# Altium PCB pcb.PCBDOC
Units mm, origin at the board's own origin, x right, y up, seen from the top; angles counter-clockwise.
Board outline 70 x 98 mm, 2 copper layers (TopLayer, BottomLayer), stack 1.671 mm thick; 33 components, 41 nets, 144 pads, 28 vias.
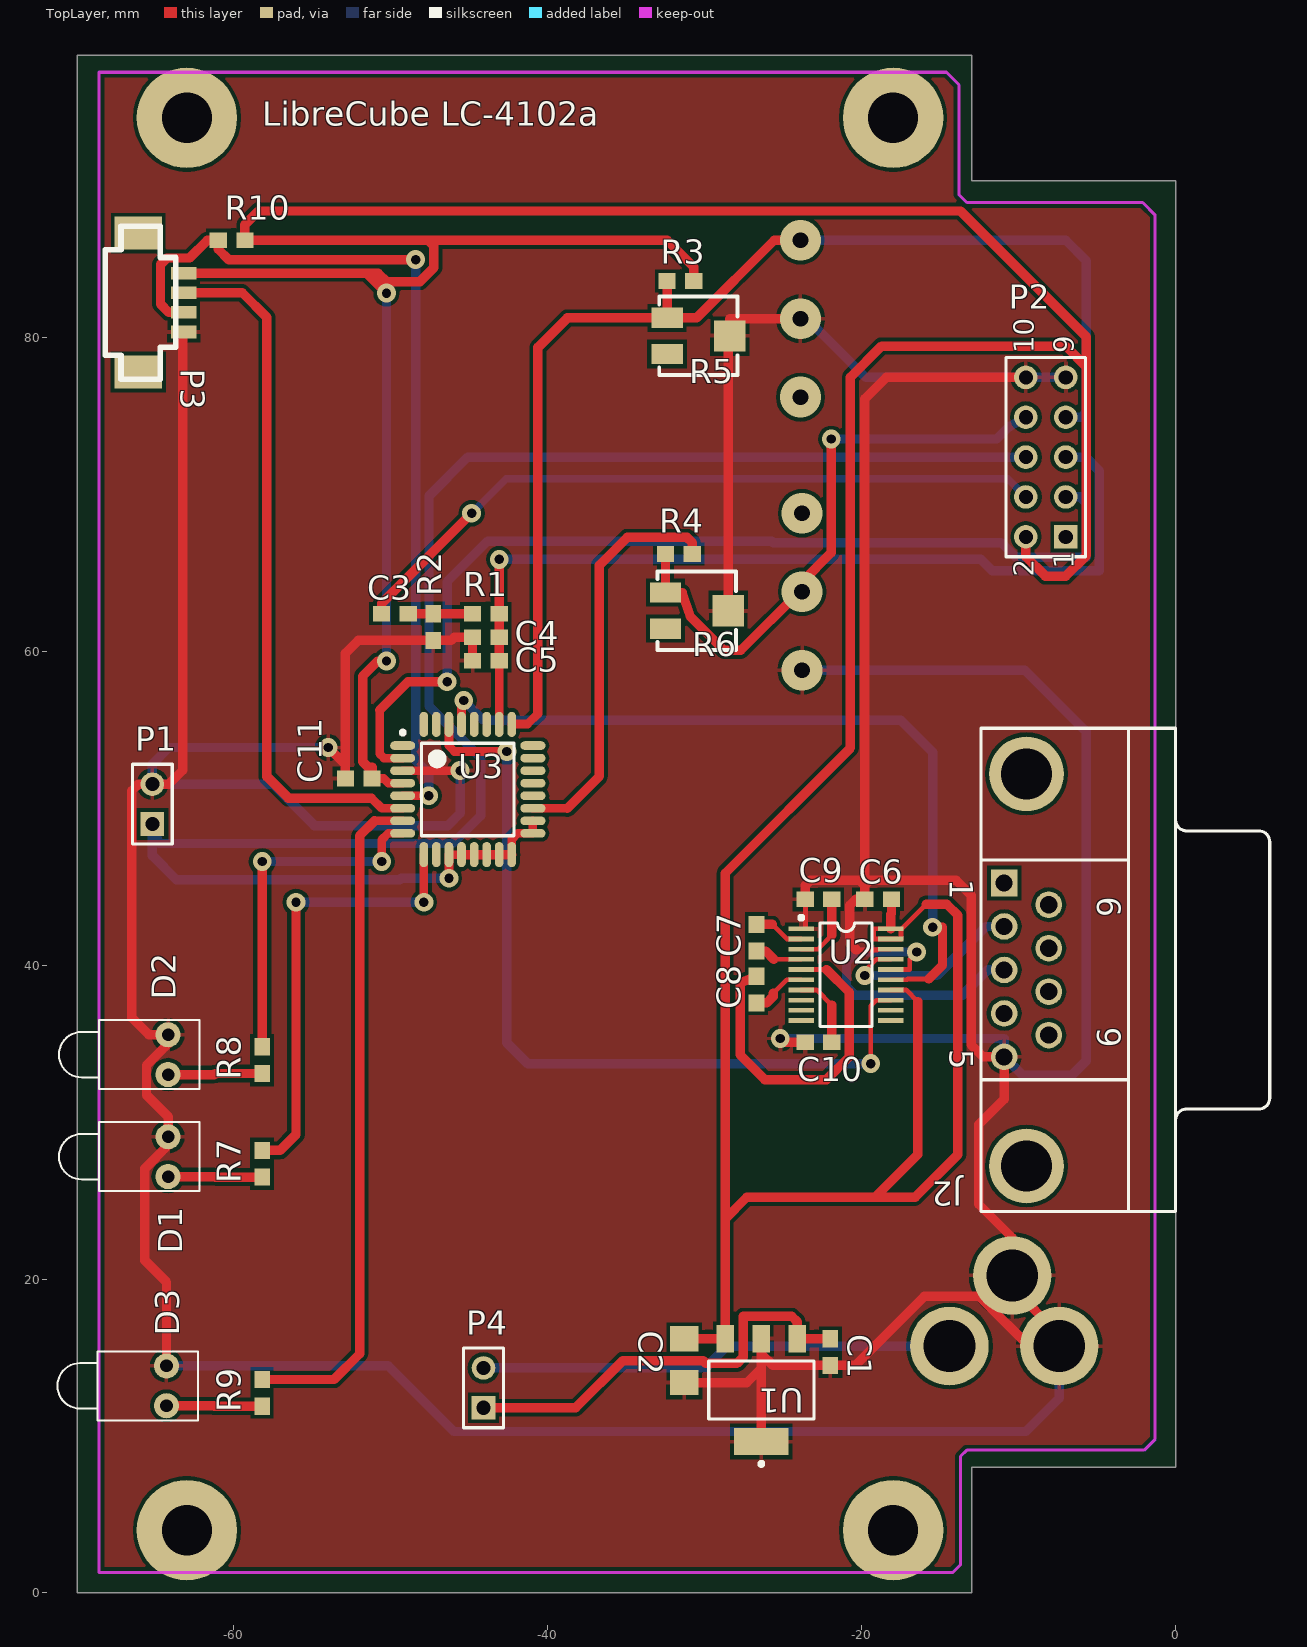
[diagram p0: TopLayer view]
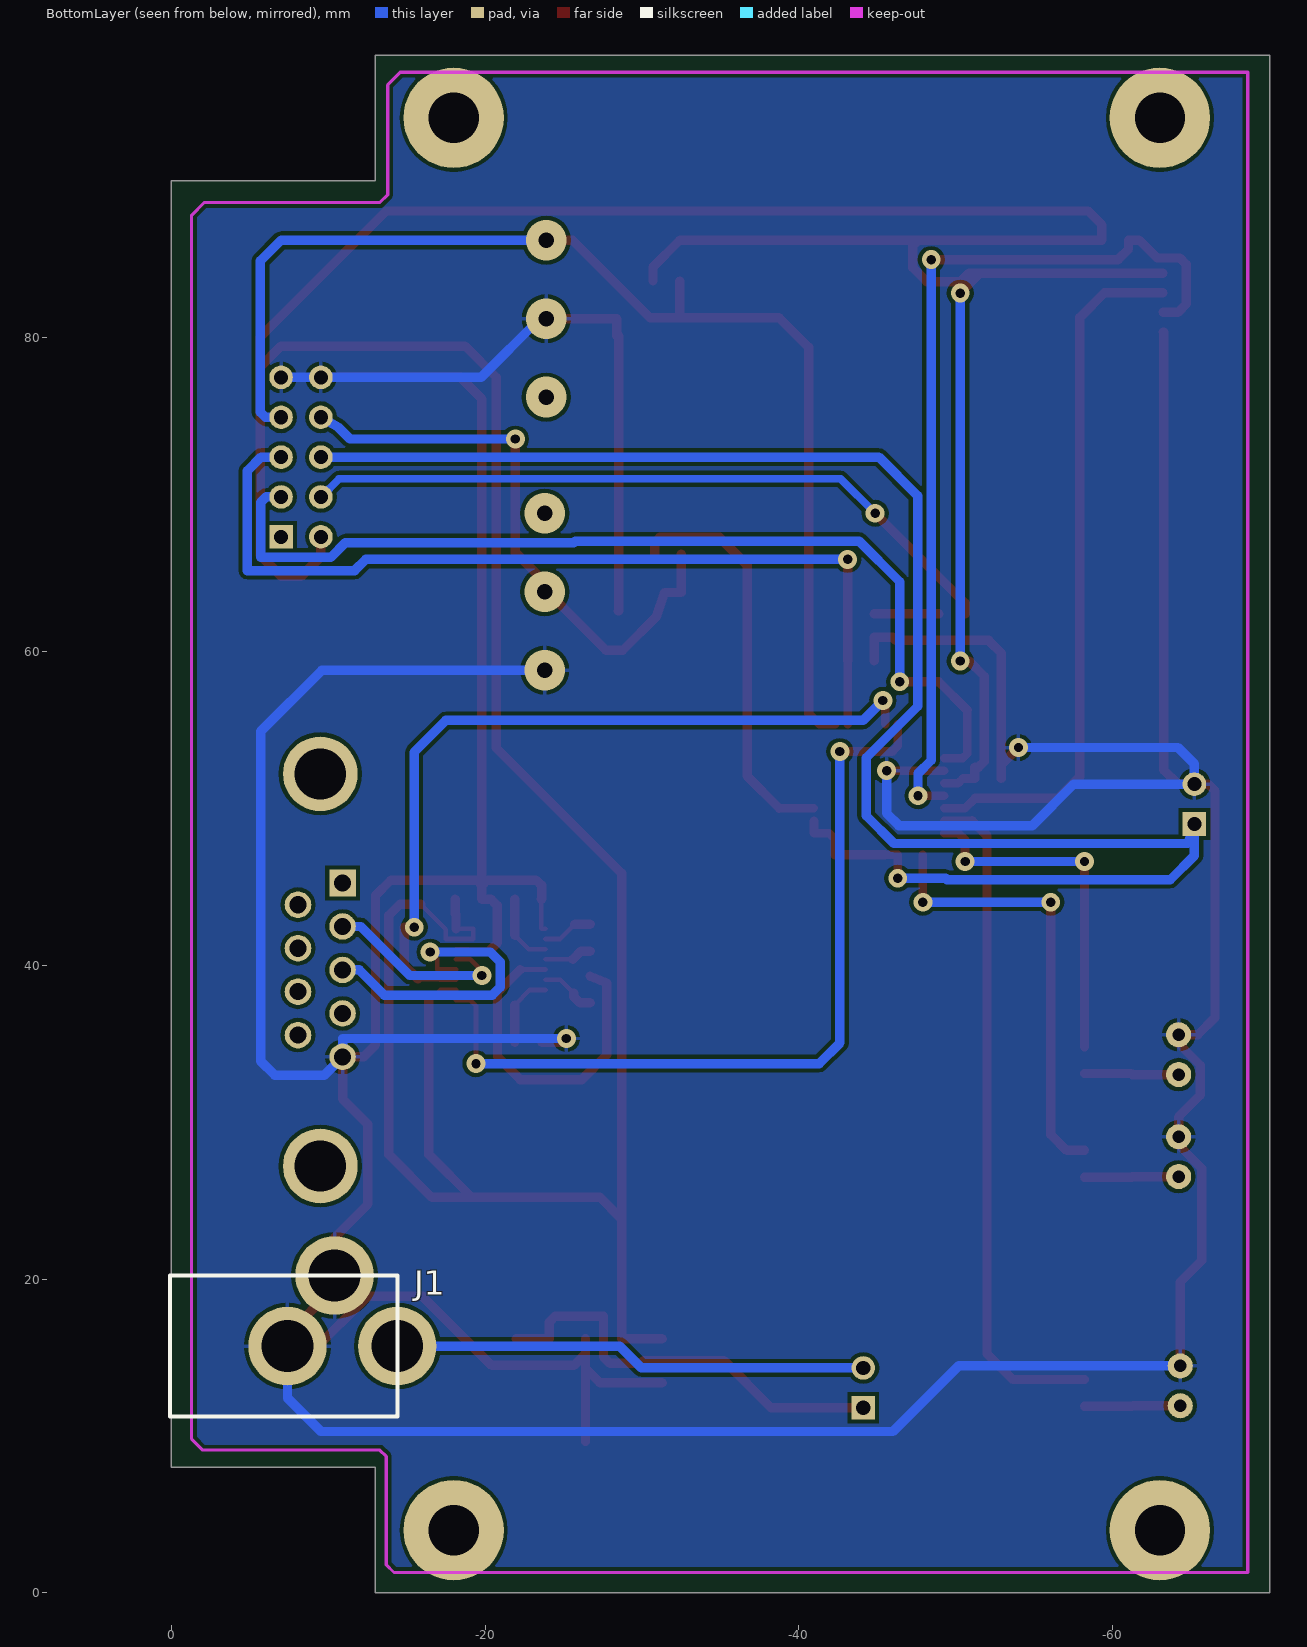
[diagram p1: BottomLayer view, seen from below]

## Layer stack, top to bottom
TopLayer: signal copper 0.0356
Dielectric: core 1.6, FR-4, Dk 4.8
BottomLayer: signal copper 0.0356

## Board outline
-70,0 -13,0 -13,8 0,8 0,90 -13,90 -13,98 -70,98

## Design rules (kind name [scope] priority, off if disabled: settings)
Clearance [All] p1: gap=0.25
FabricationTestPointUsage TestPointUsage [All] p1: valid=0 allowmultiple=FALSE
FabricationTestpoint Testpoint [All] p1: side=3 testpointundercomponent=TRUE minsize=1.016 maxsize=2.54 preferedsize=1.524 minholesize=0.508 maxholesize=1.016 preferedholesize=0.813 testpointgrid=0.025 allowsidetop=TRUE allowsidebottom=TRUE usegrid=TRUE gridtolerance=0
PlaneClearance [All] p1: clearance=0
PolygonConnect [All] p1: connectstyle=Relief reliefconductorwidth=0.254 reliefentries=4 polygonreliefangle="90 Angle"
RoutingVias [All] p1: holewidth=0.6 width=1.2 viastyle="Through Hole" minholewidth=0.2 minwidth=0.4 maxholewidth=5 maxwidth=10
SMDNeckDown [All] p1: percent=100.000
SilkscreenOverComponentPads [All] p1: minsilkscreentomaskgap=0.254
SolderMaskExpansion [All] p1: expansion=0.102
Width [All] p1: maxlimit=10 minlimit=0.3 preferedwidth=0.6
24 further rules are at their usual default settings.

## Classes and differential pairs
component class main: C1 C2 C3 C4 C5 C6 C7 C8 C9 C10 D1 D2 D3 J1 J2 P1 P2 P4 R1 R2 R3 R4 R5 R6 R7 R8 R9 R? U1 U2
component class "U_microcontroller module": C11 P3 R10 U3

## Components (designator, comment, footprint, x,y, rotation, side; value= is the part's Value field where it differs from the comment)
C1 "0.1 uF" 0603 -22,14.5 r90 top
C2 "10 uF" 1206 -31.3,13.4 r90 top
C3 "2.2 uF" 0603 -50.6,62.4 r0 top
C4 "470 pF" 0603 -44.8,60.9 r0 top
C5 "470 pF" 0603 -44.8,59.4 r0 top
C6 "0.1 uF" 0603 -19.8,44.2 r0 top
C7 "0.1 uF" 0603 -26.7,42.6 r270 top
C8 "0.1 uF" 0603 -26.7,37.6 r90 top
C9 "0.1 uF" 0603 -21.9,44.2 r180 top
C10 "0.1 uF" 0603 -23.6,35.1 r0 top
C11 "0.1 uF" 0603 -51.2,51.9 r180 top
D1 "LED1" LED-1 -64.2,27.8 r180 top
D2 "LED1" LED-1 -64.2,34.3 r180 top
D3 "LED1" LED-1 -64.3,13.2 r180 top
J1 "MINIJACK-1.3" POWERJACK -9.5,15.5 r270 bottom
J2 "D Connector 9" DSUB1.385-2H9 0,39.7 r270 top
P1 "Header 2" HDR1X2 -65.2,49 r90 top
P2 "Header 5X2" HDR2X5 -7,67.3 r90 top
P3 "MICRO-04-R-SMT" MICRO-04-R-SMT -63.2,84.1 r270 top
P4 "Header 2" HDR1X2 -44.1,11.8 r90 top
R1 "120 k" 0603 -43.1,62.4 r180 top
R2 "100 k" 0603 -47.3,60.7 r90 top
R3 "1 k" 0603 -32.4,83.6 r0 top
R4 "1 k" 0603 -32.5,66.2 r0 top
R5 "RPot SM" POT4MM-2 -30.4,80.1 r0 top
R6 "RPot SM" POT4MM-2 -30.5,62.6 r0 top
R7 "1 k" 0603 -58.2,26.5 r90 top
R8 "1 k" 0603 -58.2,33.1 r90 top
R9 "1 k" 0603 -58.2,11.9 r90 top
R10 "1 k" 0603 -59.3,86.2 r180 top
U1 "LM2937-3.3" SOT-223 -24.099,16.2 r180 top
U2 "MAX3223" TSSOP-20 -21,39.4 r270 top
U3 "C8051F310" TQFP-32 -45.1,51.2 r0 top

## Footprints (in the part's own frame and the unit in brackets; to place one, negate y for a bottom-side part, rotate by r counter-clockwise, add the part's x,y. Pads: shape width x height; smd on the part's side, far side on the other; paste and mask are expansions set on the pad)
0603 [mm] "Chip Capacitor; Body 1.6 x 0.8 mm (LxW typ)"
  rect 1.1x1 smd: 1(0,0) 2(1.7,0)
1206 [mm] "Chip Capacitor; Body 3.2 x 1.6 mm (LxW typ)"
  rect 1.6x1.8 smd: 1(0,0) 2(2.8,0)
DSUB1.385-2H9 [mm] "Connector; D Subminiature; 9 Position; Right Angle; Pitch 1.385 mm"
  rect 1.69x1.69 hole 1.09: 1(-5.54,-10.92)
  round 1.69 hole 1.09: 2(-2.77,-10.92) 3(0,-10.92) 4(2.77,-10.92) 5(5.54,-10.92) 6(-4.155,-8.08) 7(-1.385,-8.08) 8(1.385,-8.08) 9(4.155,-8.08)
  round 4.76 hole 3.26: 10(-12.495,-9.5) 11(12.495,-9.5)
  silkscreen extent -15.4,-12.4 15.4,6
HDR1X2 [mm] "Connector; Header; 2 Position"
  rect 1.5x1.5 hole 0.9: 1(0,0)
  round 1.5 hole 0.9: 2(2.54,0)
  silkscreen extent -1.27,-1.27 3.81,1.27
HDR2X5 [mm] "Connector; Header; 5x2 Position"
  rect 1.5x1.5 hole 0.9: 1(0,0)
  round 1.5 hole 0.9: 2(0,2.54) 3(2.54,0) 4(2.54,2.54) 5(5.08,0) 6(5.08,2.54) 7(7.62,0) 8(7.62,2.54) 9(10.16,0) 10(10.16,2.54)
  silkscreen extent -1.27,-1.27 11.43,3.81
LED-1 [mm] "Typical RED GaAs LED; 2 Leads"
  round 1.6 hole 0.8: 1(0,1.27) 2(0,-1.27)
  silkscreen extent -2,-2.2 6.95,2.2
MICRO-04-R-SMT [mm] "Micro Connector Rectangular"
  rect 0.8x1.6 smd: 1(0,0) 2(1.25,0) 3(2.5,0) 4(3.75,0)
  rect 2.1x3 smd: ""(-2.55,-2.9) ""(6.3,-2.9)
  silkscreen extent -3,-5 6.75,-0.5
POT4MM-2 [mm] "Square Trimming Potentiometer"
  rect 2x1.3 smd: CCW(-2,-1.15) CW(-2,1.15)
  rect 2x2 smd: W(2,0)
  silkscreen extent -2.5,-2.5 2.5,2.5
POWERJACK [mm]
  round 5 hole 3.3: 1(-0.23,4.91) 2(-4.73,0.91) 3(-0.23,-2.09)
  silkscreen extent -4.73,-9.59 4.27,4.91
SOT-223 [mm]
  rect 1.1x1.75 smd: 1(0,0) 2(2.3,0) 3(4.6,0)
  rect 3.45x1.75 smd: 4(2.3,6.55)
  silkscreen extent -1.05,1.43 5.65,8.1
TQFP-32 [mm] "TQFP, 32-Leads, Body 9.0x9.0mm (max), Pitch 0.80mm, IPC Medium Density"
  oval 1.6x0.55 smd: 1(-4.15,2.8) 2(-4.15,2) 3(-4.15,1.2) 4(-4.15,0.4) 5(-4.15,-0.4) 6(-4.15,-1.2) 7(-4.15,-2) 8(-4.15,-2.8) 17(4.15,-2.8) 18(4.15,-2) 19(4.15,-1.2) 20(4.15,-0.4) 21(4.15,0.4) 22(4.15,1.2) 23(4.15,2) 24(4.15,2.8)
  oval 0.55x1.6 smd: 9(-2.8,-4.15) 10(-2,-4.15) 11(-1.2,-4.15) 12(-0.4,-4.15) 13(0.4,-4.15) 14(1.2,-4.15) 15(2,-4.15) 16(2.8,-4.15) 25(2.8,4.15) 26(2,4.15) 27(1.2,4.15) 28(0.4,4.15) 29(-0.4,4.15) 30(-1.2,4.15) 31(-2,4.15) 32(-2.8,4.15)
  silkscreen extent -4.27,-2.95 2.95,3.75
TSSOP-20 [mm] "Shrink Small Outline; 20 Leads; Body Width 4.4 mm; Pitch 0.65 mm"
  rect 0.3x1.6 smd: 1(-2.925,-2.85) 2(-2.275,-2.85) 3(-1.625,-2.85) 4(-0.975,-2.85) 5(-0.325,-2.85) 6(0.325,-2.85) 7(0.975,-2.85) 8(1.625,-2.85) 9(2.275,-2.85) 10(2.925,-2.85) 11(2.925,2.85) 12(2.275,2.85) 13(1.625,2.85) 14(0.975,2.85) 15(0.325,2.85) 16(-0.325,2.85) 17(-0.975,2.85) 18(-1.625,2.85) 19(-2.275,2.85) 20(-2.925,2.85)
  silkscreen extent -3.75,-2.97 3.3,1.65

## Part data
C1 C2 C3 C4 C5 C6 C7 C8 C9 C10: library part Capacitor, "Capacitor"
C11: library part Cap
D1 D2 D3: "Typical RED GaAs LED"
J1: library part PWRJACK-1.3
J2: "Receptacle Assembly, 9 Position, Right Angle"
P1 P4: "Header, 2-Pin"
P2: "Header, 5-Pin, Dual row"
P3: library part MICRO-04, "Micro Connector"
R1 R2 R3 R4 R7 R8 R9: library part Resistor, "Resistor"
R5 R6: "Square Trimming Potentiometer"
R10: library part Res1
U1: library part LM2937, "LDO"
U3: "336-1252-ND"

## Free pads (board coordinates)
  round 6.4 hole 3.2: ""(-63,4) ""(-63,94) ""(-18,4) ""(-18,94)

## Via types
v1: diameter 1.2, hole 0.6, TopLayer to BottomLayer, 22 vias
v2: diameter 2.6, hole 1, TopLayer to BottomLayer, 6 vias

## Nets (pads, with @x,y where several pads share a name; then routed paths per layer and width w, separated by ;. In a path a pad name is that pad's centre, name@x,y a point inside that pad or via, vN(x,y) a via of type N, cw(c..) or ccw(c..) an arc to the next point about the centre after c; other vN are vias at no path point)
+3.3V: C2.2 C6.2 C11.1 P2.2 P3.1 R3.2 R10.1 U1.3 U2.14 U2.19 U2.20 U3.4 | length 355.9
  TopLayer w0.3: U2.14 -17.16,38.425 -16.423,37.688 ; U2.20 -19.253,42.325 -19.253,41.675 U2.19 -17.49,41.675 -17.49,42.291 -15.89,43.891
  TopLayer w0.55: C11.1 -50.459,51.9 -50.159,51.6 U3.4
  TopLayer w0.6: C11.1 -51.2,52.629 -51.45,52.629 -51.806,52.984 -51.806,58.42 -50.84,59.385 v1(-50.282,59.385) ; v1(-50.282,82.83) -51.552,84.1 ; C2.2 -30.012,16.2 U1.3 ; R3.2 -30.7,84.5 -32.4,86.2 -47.64,86.2 ; U2.20 -18.15,43.231 -18.1,43.281 C6.2 ; -16.423,37.688 -16.423,27.94 -19.149,25.214 ; -15.89,43.891 -14.581,43.891 -13.87,43.18 -13.87,27.94 -16.595,25.214 -19.149,25.214 ; P2.2 -9.54,66.04 -8.295,64.795 -7,64.795 -5.679,66.116 ; R10.1 -59.3,87.197 -58.435,88.062 -13.706,88.062 -5.679,80.035 -5.679,78.13 ; R10.1 -47.64,86.2 ; R10.1 -47.64,86.2 ; -51.552,84.1 P3.1 -51.552,84.1 ; -51.552,84.1 -50.816,84.1 -50.282,83.566 -48.148,83.566 -47.259,84.455 -47.259,85.819 -47.64,86.2 ; U1.3 -28.699,23.835 ; U1.3 -28.699,23.835 ; -28.699,23.835 -28.699,45.865 -20.716,53.848 -20.716,77.47 -18.735,79.451 -7,79.451 -5.679,78.13 ; -28.699,23.835 -27.32,25.214 ; -27.32,25.214 -19.149,25.214 ; -27.32,25.214 -19.149,25.214 ; -5.679,66.116 -5.679,78.13 ; -5.679,66.116 -5.679,78.13
  BottomLayer w0.6: v1(-50.282,59.385) v1(-50.282,82.83)
+9V: J1.1 P4.2 | length 30.3
  BottomLayer w0.6: P4.2 -29.962,14.34 -28.572,15.73 J1.1
-PTT: P1.1 P2.6 U3.11 U3.12 U3.13 U3.14 U3.15 U3.16 U3.17 U3.18 | length 113.7
  TopLayer w0.55: v1(-46.3,45.542) U3.11@-46.3,47.041 ; U3.12 -45.5,47.041 U3.11@-46.3,47.041 ; U3.16 -42.3,48.025 -41.925,48.4 U3.17@-40.96,48.4 ; U3.18 -40.96,49.2 U3.17@-40.96,48.4 ; U3.11@-46.3,47.041 U3.11 U3.11@-46.3,47.041 ; U3.17@-40.96,48.4 U3.17 U3.17@-40.96,48.4
  TopLayer w0.6: U3.12 U3.13 U3.14 U3.15 U3.16
  BottomLayer w0.6: v1(-46.3,45.542) -49.348,45.542 -49.436,45.453 -63.663,45.453 -65.2,46.99 P1.1 -64.785,47.759 -46.058,47.759 -44.287,49.53 -44.287,53.225 -47.571,56.508 -47.571,69.909 -45.1,72.38 P2.6
C2CK: P3.3 R10.2 U3.5 | length 58.1
  TopLayer w0.55: U3.5 v1(-47.589,50.8)
  TopLayer w0.6: P3.3 -64.15,81.6 -64.683,82.133 -64.683,84.658 -64.277,85.065 -62.829,85.065 -61.694,86.2 R10.2 -61,85.623 -60.34,84.963 v1(-48.427,84.963)
  BottomLayer w0.6: v1(-48.427,84.963) -48.427,53.061 -47.589,52.222 v1(-47.589,50.8)
C2D: P3.2 U3.6 | length 44.7
  TopLayer w0.55: -51.234,50.648 -50.586,50 U3.6
  TopLayer w0.6: P3.2 -59.472,82.85 -57.902,81.28 -57.902,52.019 -56.53,50.648 -51.234,50.648
COMP0: P2.3 U3.2 | length 62.9
  TopLayer w0.55: -50.715,56.26 -50.715,53.467 -50.447,53.2 U3.2
  TopLayer w0.6: -50.715,56.26 -48.91,58.064 v1(-46.421,58.064)
  BottomLayer w0.6: v1(-46.421,58.064) -46.421,64.44 -43.83,67.031 -25.745,67.031 -25.644,66.929 -11.104,66.929 -10.175,66 -5.7,66 -5.7,69.492 -6.048,69.84 P2.3
COMP0_NEG: P2.7 R3.1 R5.CW U3.25 | length 77.1
  TopLayer w0.55: U3.25 -42.3,55.372 -41.29,55.372 -40.63,56.032
  TopLayer w0.6: -40.63,56.032 -40.63,79.37 -38.75,81.25 R5.CW ; R3.1 R5.CW ; v2(-23.9,86.2) -25.57,86.2 -30.52,81.25 R5.CW
  BottomLayer w0.6: v2(-23.9,86.2) -7,86.2 -5.679,84.879 -5.679,75.248 -6.007,74.92 P2.7
COMP0_POS: C4.2 C5.2 P2.5 R1.1 U3.26 | length 57.9
  TopLayer w0.55: U3.26 -43.1,56.744 C5.2
  TopLayer w0.6: C5.2 -43.1,60.147 C4.2 R1.1 v1(-43.1,65.862)
  BottomLayer w0.6: v1(-43.1,65.862) -12.402,65.862 -11.69,65.15 -4.85,65.15 -4.85,71.5 -5.73,72.38 P2.5
DATAIN: C3.1 P2.4 | length 45.5
  TopLayer w0.6: C3.1 -50.6,63.055 v1(-44.855,68.8)
  BottomLayer w0.5: v1(-44.855,68.8) -42.655,71 -10.7,71 P2.4
DATAOUT: P2.8 R4.1 R6.CW | length 38.1
  TopLayer w0.6: R4.1 R6.CW -31.448,63.75 -30.927,62.23 -28.768,60.071 -27.701,60.071 -23.972,63.8 v2(-23.8,63.8) -23.8,64.429 -21.935,66.294 v1(-21.935,73.533)
  BottomLayer w0.6: v1(-21.935,73.533) -11.394,73.533 -10.632,74.295 P2.8
GND: C1.1 C2.1 C4.1 C5.1 C6.1 C9.2 C10.1 C11.2 D1.2 D2.2 D3.2 J1.2 J1.3 J2.5 P1.2 P2.9 P2.10 P3.4 R2.1 R5.W R6.W U1.2 U1.4 U2.1 U2.18 U3.3 | length 436.4
  TopLayer w0.3: U2.1 -23.586,42.325 C9.2@-23.586,44.2 ; -20.335,40.97 -19.018,40.97 -18.963,41.025 U2.18
  TopLayer w0.55: U3.3 v1(-45.589,52.4)
  TopLayer w0.6: D3.2 -64.3,19.81 -65.674,21.184 -65.674,27.05 -64.2,28.524 D1.2 -64.2,30.353 -65.572,31.725 -65.572,33.63 -64.2,35.002 D2.2 -65.42,35.57 -66.512,36.662 -66.512,51.117 -66.09,51.54 P1.2 -64.15,51.54 -63.261,52.429 -63.261,80.35 P3.4 ; v1(-53.99,53.873) -52.9,52.783 ; C5.1 -44.8,60.147 C4.1 -45.967,60.9 -46.167,60.7 R2.1 -52.085,60.7 -52.9,59.885 -52.9,52.783 ; C2.1 -27.32,13.4 -26.399,14.321 ; R6.W -28.514,62.6 -28.514,80.1 R5.W -28.4,81.2 v2(-23.9,81.2) ; U1.4 -26.399,14.321 ; v1(-25.186,35.331) -25.186,35.1 C10.1 ; C9.2@-23.586,44.2 C9.2 -23.6,45.085 -23.27,45.415 -20.13,45.415 -19.8,45.085 ; -20.335,40.97 -20.767,41.402 -20.767,43.815 -20.382,44.2 C6.1 ; P2.10 -18.43,77.46 -19.8,76.09 -19.8,45.085 ; -52.9,52.783 C11.2 -52.9,52.783 ; -26.399,14.321 -26.399,15.24 ; -26.399,14.321 -26.399,15.24 ; -26.399,15.24 U1.2 ; -26.399,15.24 U1.2 ; -26.399,15.24 U1.2 ; -26.399,15.24 -25.659,14.5 C1.1 -20.415,14.5 -16.017,18.898 -12.504,18.898 -12.123,18.517 -9.337,15.73 J1.3 -7.41,16.459 -10.41,19.459 J1.2 -10.41,22.638 -12.537,24.765 -12.537,29.853 -10.92,31.471 J2.5 -12.255,34.16 -13.02,34.925 -13.02,44.45 -13.985,45.415 -19.47,45.415 -19.8,45.085 ; C6.1 -19.8,45.085 ; C6.1 -19.8,45.085
  BottomLayer w0.6: D3.2 -50.172,14.47 -45.989,10.287 -9.54,10.287 -7.41,12.417 J1.3 ; v1(-53.99,53.873) -64.15,53.873 -65.2,52.823 P1.2 -57.514,51.54 -54.875,48.902 -46.37,48.902 -45.589,49.682 v1(-45.589,52.4) ; v1(-25.186,35.331) -10.92,35.331 J2.5 -9.76,33 -6.6,33 -5.7,33.9 -5.7,54.9 -9.6,58.8 v2(-23.8,58.8) ; v2(-23.9,81.2) -23.481,81.2 -19.741,77.46 P2.10 P2.9
LED_POWER: R9.2 U3.7 | length 43
  TopLayer w0.55: -51.043,49.2 U3.7
  TopLayer w0.6: R9.2 -53.623,13.6 -51.983,15.24 -51.983,48.26 -51.043,49.2
LED_RX: R7.2 U3.9 | length 28.6
  TopLayer w0.55: v1(-47.9,44.018) U3.9
  TopLayer w0.6: R7.2 -57.057,28.2 -56.047,29.21 v1(-56.047,44.018)
  BottomLayer w0.6: v1(-56.047,44.018) v1(-47.9,44.018)
LED_TX: R8.2 U3.8 | length 22.3
  TopLayer w0.55: v1(-50.586,46.609) -50.586,47.994 -50.18,48.4 U3.8
  TopLayer w0.6: R8.2 v1(-58.2,46.609)
  BottomLayer w0.6: v1(-58.2,46.609) v1(-50.586,46.609)
NetC1_2: C1.2 P4.1 U1.1 | length 27.4
  TopLayer w0.6: P4.1 -38.228,11.8 -35.219,14.808 -30.114,14.808 -29.936,14.63 -27.955,14.63 -27.549,15.037 -27.549,17.628 -24.463,17.628 -24.099,17.264 U1.1 -23.053,16.2 C1.2
NetC3_2: C3.2 R1.2 R2.2 | length 4.1
  TopLayer w0.6: C3.2 R2.2 R1.2
NetC7_1: C7.1 U2.2 | length 3.2
  TopLayer w0.3: -25.705,42.6 -24.78,41.675 U2.2
  TopLayer w0.6: C7.1 -25.705,42.6
NetC7_2: C7.2 U2.4 | length 3.1
  TopLayer w0.3: -25.593,40.375 U2.4
  TopLayer w0.6: C7.2 -26.118,40.9 -25.593,40.375
NetC8_1: C8.1 U2.6 | length 3.6
  TopLayer w0.3: -25.644,38.211 -24.78,39.075 U2.6
  TopLayer w0.6: C8.1 -26.05,37.6 -25.644,38.006 -25.644,38.211
NetC8_2: C8.2 U2.5 | length 21.7
  TopLayer w0.3: U2.5 -22.24,39.725
  TopLayer w0.6: C8.2 -27.752,38.868 -27.752,34.29 -26.177,32.715 -22.24,32.715 -20.792,34.163 -20.792,38.277 -22.24,39.725
NetC9_1: C9.1 U2.3 | length 4.6
  TopLayer w0.3: U2.3 -22.785,41.025 -21.9,41.91
  TopLayer w0.6: -21.9,41.91 C9.1
NetC10_2: C10.2 U2.7 | length 4.7
  TopLayer w0.3: U2.7 -22.86,38.425 -21.9,37.465
  TopLayer w0.6: C10.2 -21.9,37.465
NetD1_1: D1.1 R7.1 | length 6
  TopLayer w0.6: D1.1 -61.229,26.53 -61.199,26.5 R7.1
NetD2_1: D2.1 R8.1 | length 6
  TopLayer w0.6: D2.1 -61.254,33.03 -61.184,33.1 R8.1
NetD3_1: D3.1 R9.1 | length 6.1
  TopLayer w0.6: D3.1 -61.28,11.93 -61.25,11.9 R9.1
NetR4_2: R4.2 U3.19 | length 26
  TopLayer w0.55: U3.19 -38.75,50
  TopLayer w0.6: -38.75,50 -36.718,52.032 -36.718,65.481 -34.94,67.259 -31.13,67.259 -30.8,66.929 R4.2
NetU3_1: U3.1
NetU3_10: U3.10
NetU3_20: U3.20
NetU3_21: U3.21
NetU3_22: U3.22
NetU3_23: U3.23
NetU3_24: U3.24
NetU3_27: U3.27
NetU3_28: U3.28
NetU3_31: U3.31
NetU3_32: U3.32
RXD: U2.13 U3.30 | length 52.6
  TopLayer w0.3: v1(-19.421,33.731) -19.421,37.419 -19.065,37.775 U2.13
  TopLayer w0.55: U3.30 -46.3,53.975 -45.944,53.619
  TopLayer w0.6: -45.944,53.619 v1(-42.611,53.619)
  BottomLayer w0.6: v1(-42.611,53.619) -42.611,35.052 -41.29,33.731 v1(-19.421,33.731)
RXD_TTL: J2.2 U2.17 | length 12.4
  TopLayer w0.3: v1@-19.802,39.638 -19.065,40.375 U2.17
  TopLayer w0.6: v1(-19.802,39.345) v1@-19.802,39.638
  BottomLayer w0.6: v1(-19.802,39.345) -15.205,39.345 -12.08,42.47 J2.2
TXD: U2.15 U3.29 | length 50.8
  TopLayer w0.3: U2.15 -17.116,39.075 -17.066,39.125 -15.729,39.125
  TopLayer w0.55: U3.29 -45.5,56.871 v1(-45.354,56.871)
  TopLayer w0.6: -15.729,39.125 -14.849,40.005 -14.849,42.418 v1(-15.484,42.418)
  BottomLayer w0.6: v1(-45.354,56.871) -44.083,55.6 -17.5,55.6 -15.484,53.584 v1(-15.484,42.418)
TXD_TTL: J2.3 U2.16 | length 19.8
  TopLayer w0.3: U2.16 -16.946,39.725 -16.946,40.397 v1(-16.5,40.843)
  BottomLayer w0.6: v1(-16.5,40.843) -20.335,40.843 -20.97,40.208 -20.97,38.608 -20.462,38.1 -13.579,38.1 -11.979,39.7 J2.3
pads on no net: J2.1 J2.4 J2.6 J2.7 J2.8 J2.9 J2.10 J2.11 P2.1 P3. R5.CCW R6.CCW U2.8 U2.9 U2.10 U2.11 U2.12
copper on no net:
  other v2: -23.8,68.8 -23.9,76.2

## Polygon pours and split planes (outlines as drawn)
GND on TopLayer "TopLayer-No Net" (solid, remove dead copper, pour order 1000): -69.779,-0.156 0.221,-0.156 0.221,97.844 -69.779,97.844
GND on BottomLayer "TopLayer-No Net" (solid, remove dead copper, pour order 1001): -69.851,0.056 0.149,0.056 0.149,98.056 -69.851,98.056

## Keep-outs
KeepOutLayer:
  lines w0.2: -68.6,1.3 -14.2,1.3 -13.7,1.8 -13.7,8.7 -13.3,9.1 -2,9.1 -1.3,9.8 -1.3,87.8 -2.1,88.6 -13.3,88.6 -13.8,89.1 -13.8,96.1 -14.6,96.9 -68.6,96.9 -68.6,1.3

## Silkscreen, mask and mechanical layers (free items; w line width, h text height)
TopOverlay:
  text "LibreCube LC-4102a" at -58.2,93.5 h1.52
Mechanical1:
  the board outline again, w0.203

## Text inside footprints (layer, text, board x,y; h text height)
J2: TopOverlay "1" at -14.375,45.49 h1.5 r270; TopOverlay "5" at -14.375,34.66 h1.5 r270; TopOverlay "9" at -4.975,36.045 h1.5 r270; TopOverlay "6" at -4.975,44.355 h1.5 r270
P2: TopOverlay "10" at -9.032,78.984 h1.27 r90; TopOverlay "9" at -6.492,78.984 h1.27 r90; TopOverlay "1" at -6.492,65.268 h1.27 r90; TopOverlay "2" at -9.032,64.76 h1.27 r90